# Altium PCB CDF_sensor_pcb.PcbDoc
Units mm, origin at the board's own origin, x right, y up, seen from the top; angles counter-clockwise.
Board outline 152.4 x 101.6 mm, 2 copper layers (Top Layer, Bottom Layer); 5 components, 4 nets, 43 pads, 0 vias.
Unrouted connection lines stored in the file: 1.
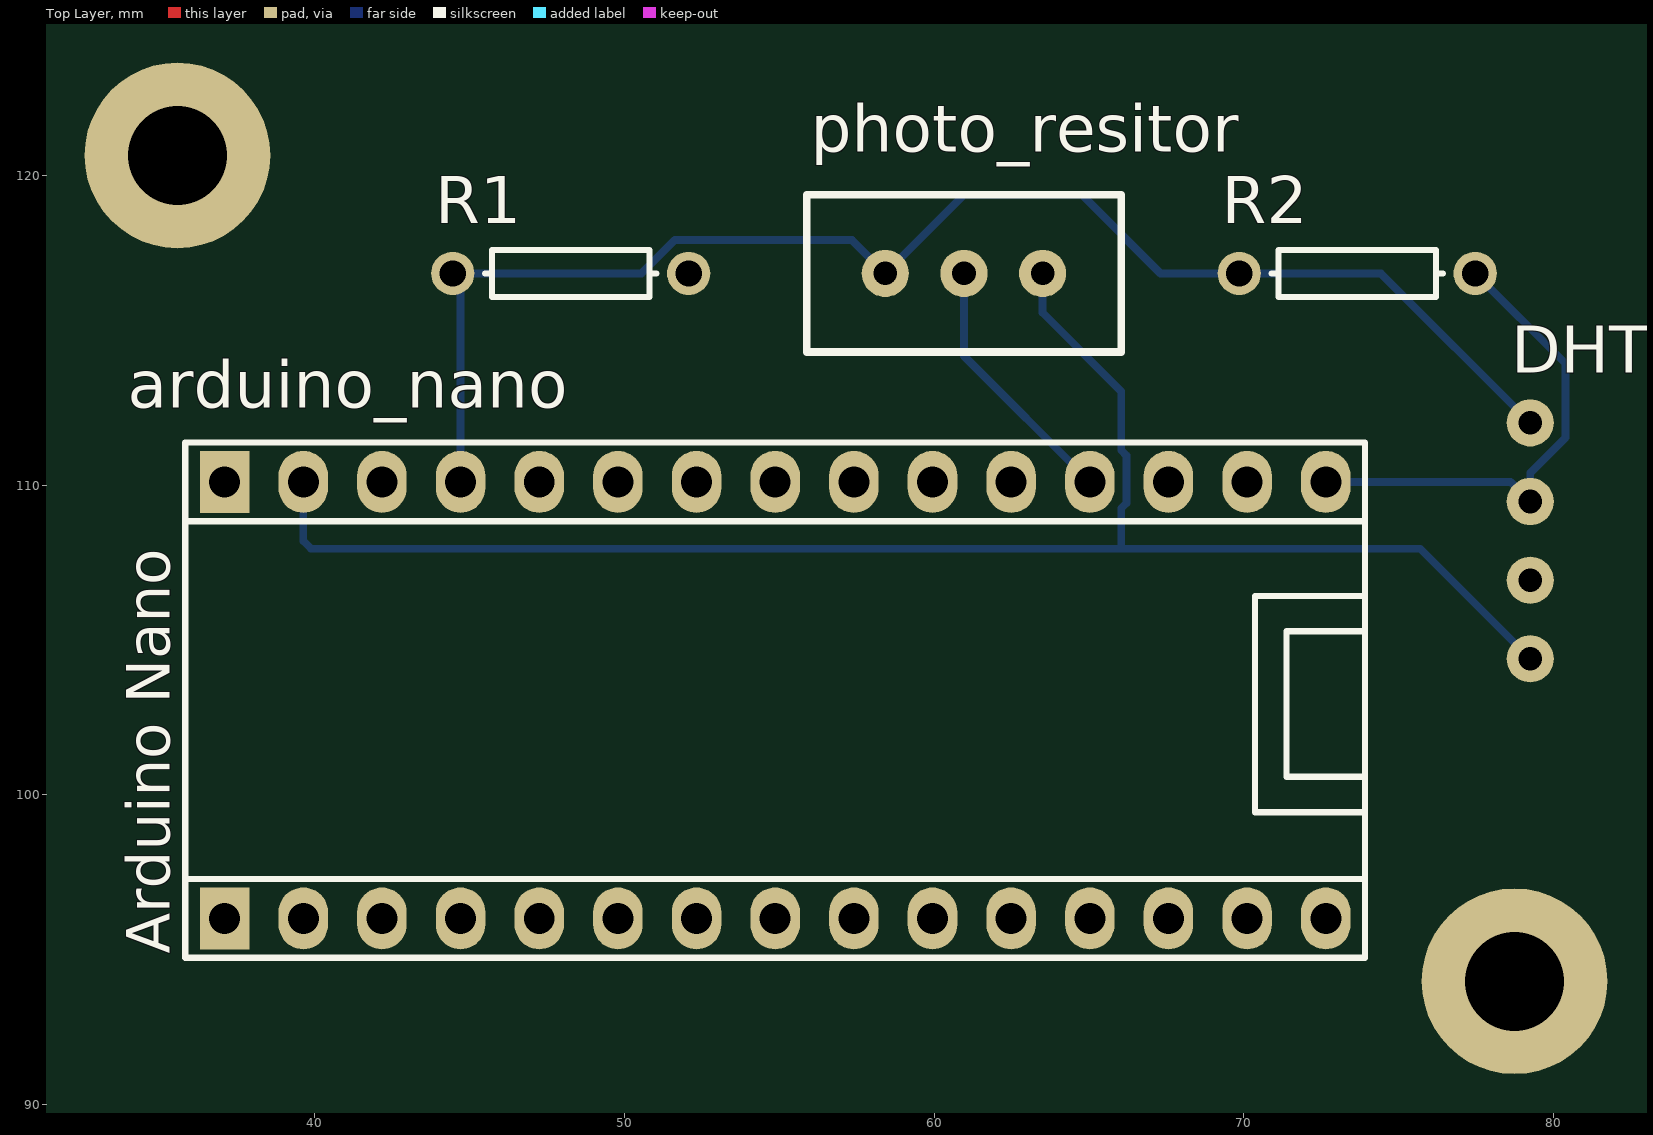
[diagram p0: Top Layer view]
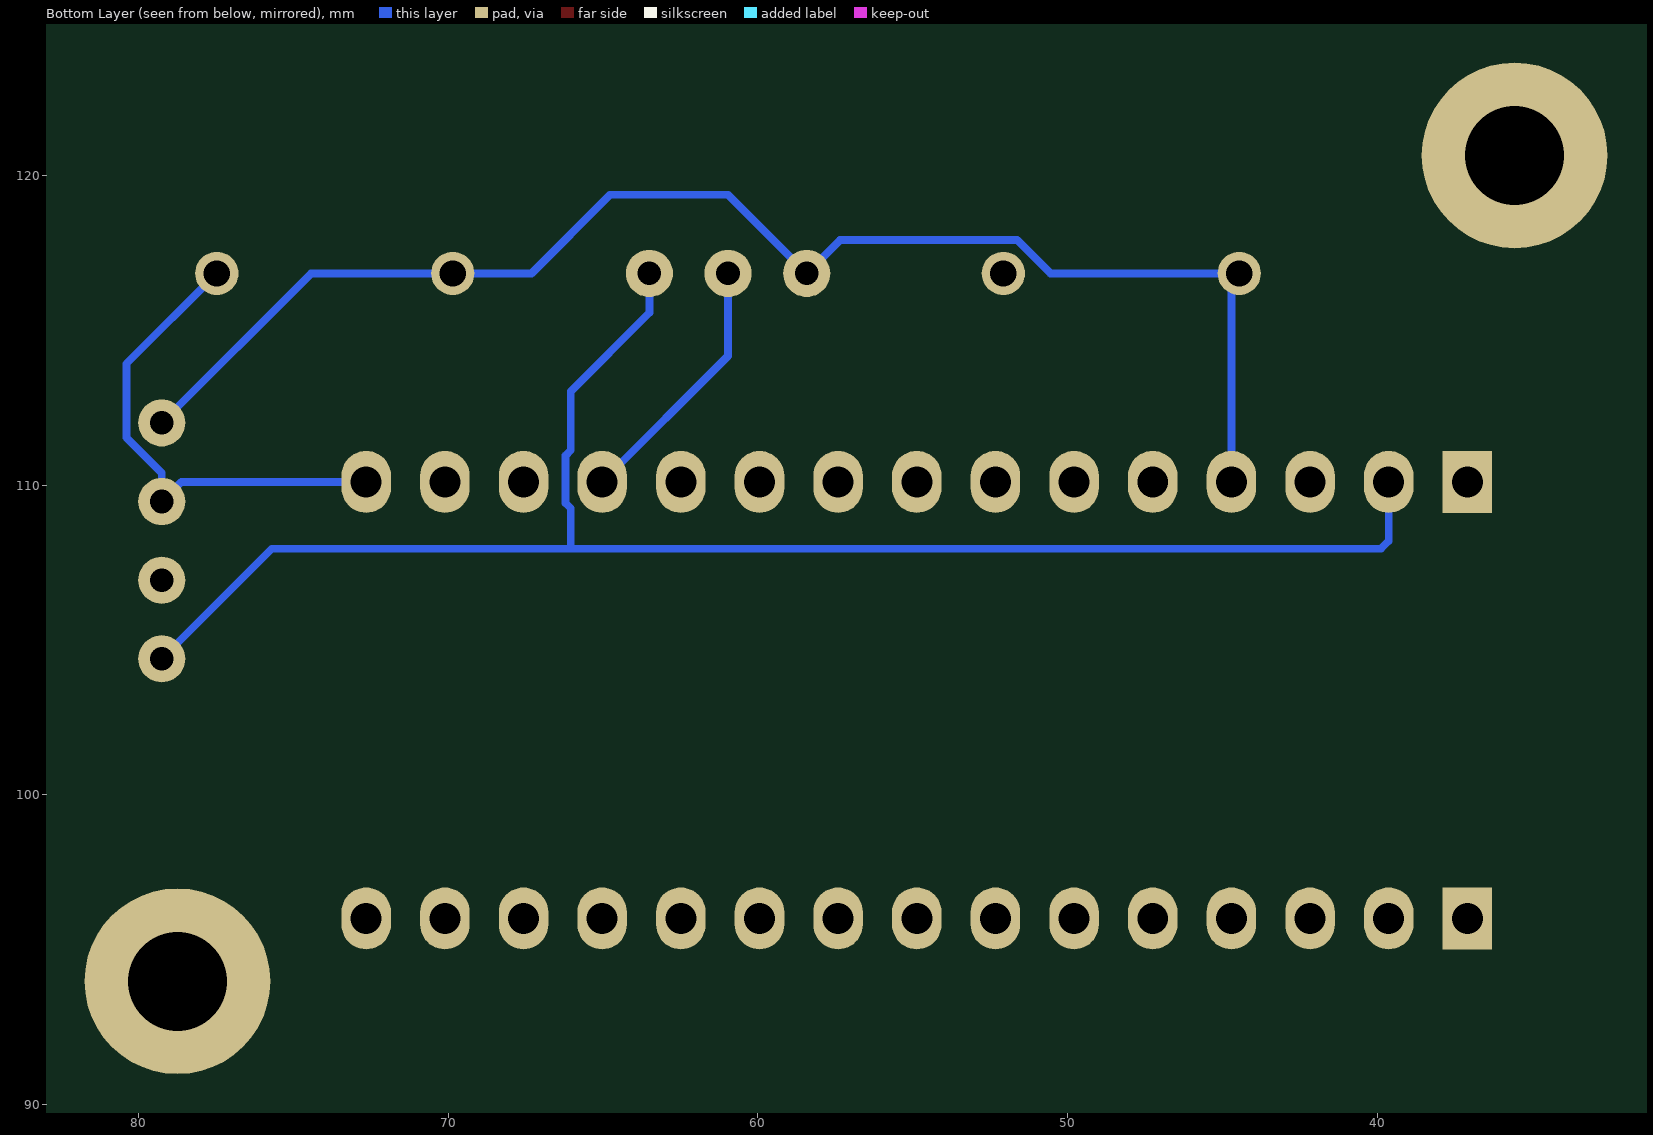
[diagram p1: Bottom Layer view, seen from below]

## Layer stack, top to bottom
Top Solder: solder mask 0.0102, Solder Resist, Dk 3.5
Top Layer: signal copper 0.0356
Dielectric 1: dielectric 0.32, FR-4, Dk 4.8
Bottom Layer: signal copper 0.0356
Bottom Solder: solder mask 0.0102, Solder Resist, Dk 3.5

## Board outline
25.4,25.4 177.8,25.4 177.8,127 25.4,127

## Design rules (kind name [scope] priority, off if disabled: settings)
Clearance [All] p1: gap=0.254
PolygonConnect [All] p1: connectstyle=Relief reliefconductorwidth=0.254 reliefentries=4 polygonreliefangle="90 Angle" airgapwidth=0.254
RoutingVias [All] p1: holewidth=0.711 width=1.27 viastyle="Through Hole" minholewidth=0.711 minwidth=1.27 maxholewidth=0.711 maxwidth=1.27
SolderMaskExpansion [All] p1: expansion=0.102
Width [All] p1: maxlimit=0.254 minlimit=0.254 preferedwidth=0.254
30 further rules are at their usual default settings.

## Components (designator, comment, footprint, x,y, rotation, side; value= is the part's Value field where it differs from the comment)
arduino_nano "Arduino Nano" arduino_nano_v3 55.88,102.87 r180 top
DHT11 "sensor humidity & température" DHT11 1323.848,-1138.936 r270 top
photo_resitor "photo_resistor_with_res_bridge" photo_resitor 1296.67,1348.74 r0 top
R1 "Res1" AXIAL-0.3 48.26,116.84 r180 top
R2 "Res1" AXIAL-0.3 73.66,116.84 r180 top

## Footprints (in the part's own frame and the unit in brackets; to place one, negate y for a bottom-side part, rotate by r counter-clockwise, add the part's x,y. Pads: shape width x height; smd on the part's side, far side on the other; paste and mask are expansions set on the pad)
arduino_nano_v3 [mm]
  rect 1.6x2 hole 1: 1(18.796,6.858) 30(18.796,-7.239)
  oval 1.6x2 hole 1: 2(16.256,6.858) 3(13.716,6.858) 4(11.176,6.858) 5(8.636,6.858) 6(6.096,6.858) 7(3.556,6.858) 8(1.016,6.858) 9(-1.524,6.858) 10(-4.064,6.858) 11(-6.604,6.858) 12(-9.144,6.858) 13(-11.684,6.858) 14(-14.224,6.858) 15(-16.764,6.858) 16(-16.764,-7.239) 17(-14.224,-7.239) 18(-11.684,-7.239) 19(-9.144,-7.239) 20(-6.604,-7.239) 21(-4.064,-7.239) 22(-1.524,-7.239) 23(1.016,-7.239) 24(3.556,-7.239) 25(6.096,-7.239) 26(8.636,-7.239) 27(11.176,-7.239) 28(13.716,-7.239) 29(16.256,-7.239)
  silkscreen extent -18.03,-8.51 20.07,8.13
AXIAL-0.3 [mm] "Axial Device, Thru-Hole; 2 Leads; 0.3 in Pin Spacing"
  round 1.4 hole 0.85: 1(-3.81,0) 2(3.81,0)
  silkscreen extent -2.77,-0.76 2.77,0.76
DHT11 [mil] "humidity & temperature sensor"
  round 60 hole 30: Data(-49150,-49000) GND(-48950,-49000) "pin 3"(-49050,-49000) VCC(-49250,-49000)
photo_resitor [mil] "photo resistance with resistor"
  round 60 hole 30: Data(-48650,-48500) GND(-48550,-48500) VCC(-48750,-48500)
  silkscreen extent -48850,-48600 -48450,-48400

## Part data
arduino_nano: library part arduino_nano_V3, "arduino_nano_v3"
DHT11: library part DHT11
photo_resitor: library part photo_resistor
R1 R2: "Resistor"

## Free pads (board coordinates)
  round 6 hole 3.2: 11(35.56,120.65) 12(78.74,93.98)

## Nets (pads, with @x,y where several pads share a name; then routed paths per layer and width w, separated by ;. In a path a pad name is that pad's centre, name@x,y a point inside that pad or via, vN(x,y) a via of type N, cw(c..) or ccw(c..) an arc to the next point about the centre after c; other vN are vias at no path point)
GND: arduino_nano.29 DHT11.GND photo_resitor.GND | length 53.2
  Bottom Layer w0.254: arduino_nano.29 39.624,108.204 39.878,107.95 66.04,107.95 ; photo_resitor.GND 63.5,115.57 66.04,113.03 66.04,111.128 66.205,110.963 66.205,109.42 66.04,109.255 66.04,107.95 ; DHT11.GND 75.692,107.95 66.04,107.95
Netarduino_nano_16: arduino_nano.16 DHT11.Data R2.1 | length 15.9
  Bottom Layer w0.254: arduino_nano.16 78.613,110.109 DHT11.Data 79.248,110.398 80.391,111.541 80.391,113.919 R2.1
Netarduino_nano_19: arduino_nano.19 photo_resitor.Data R1.1 | length 8.4
  Bottom Layer w0.254: photo_resitor.Data 60.96,114.173 arduino_nano.19
VCC: arduino_nano.27 DHT11.VCC photo_resitor.VCC R1.2 R2.2 | length 46.3
  Bottom Layer w0.254: R1.2 50.541,116.84 51.622,117.921 57.339,117.921 photo_resitor.VCC 60.96,119.38 64.77,119.38 67.31,116.84 R2.2 74.422,116.84 DHT11.VCC ; arduino_nano.27 R1.2@44.704,116.586
pads on no net: "DHT11.pin 3" arduino_nano.1 arduino_nano.2 arduino_nano.3 arduino_nano.4 arduino_nano.5 arduino_nano.6 arduino_nano.7 arduino_nano.8 arduino_nano.9 arduino_nano.10 arduino_nano.11 arduino_nano.12 arduino_nano.13 arduino_nano.14 arduino_nano.15 arduino_nano.17 arduino_nano.18 arduino_nano.20 arduino_nano.21 arduino_nano.22 arduino_nano.23 arduino_nano.24 arduino_nano.25 arduino_nano.26 arduino_nano.28 arduino_nano.30

## Silkscreen, mask and mechanical layers (free items; w line width, h text height)
Mechanical 1:
  lines w0.25: 30.48,90.17 30.48,123.19 30.48,124.46 82.55,124.46 82.55,90.17 30.48,90.17